# Altium PCB MPU6050.pcbdoc
Units mm, origin at the board's own origin, x right, y up, seen from the top; angles counter-clockwise.
Board outline 22.23 x 31 mm, 2 copper layers (Top Layer, Bottom Layer); 13 components, 155 nets, 57 pads, 16 vias.
Unrouted connection lines stored in the file: 101.
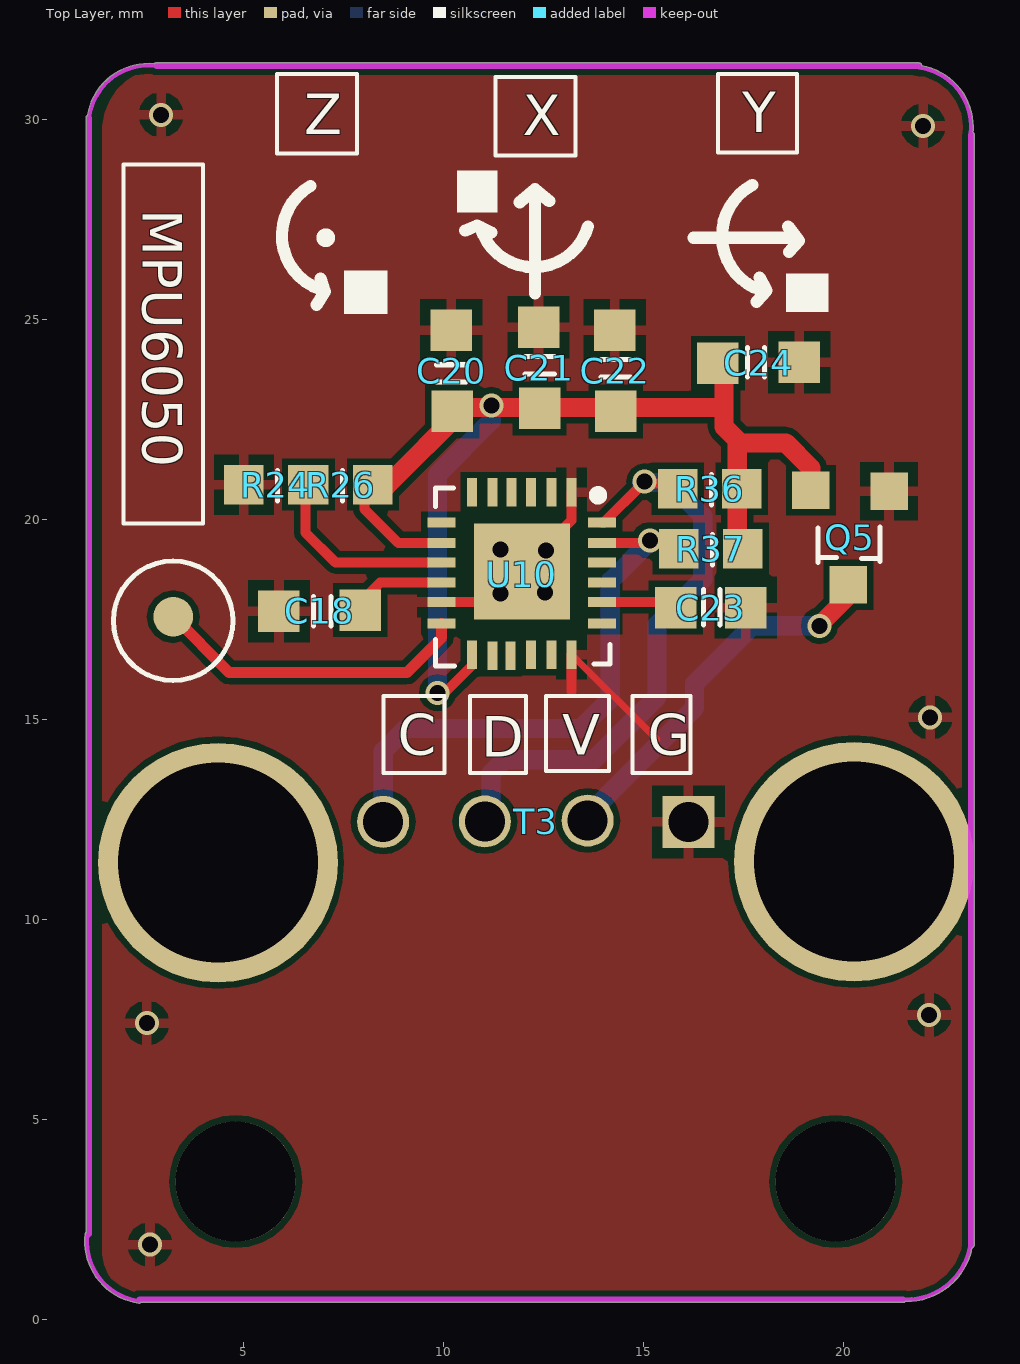
[diagram p0: Top Layer view]
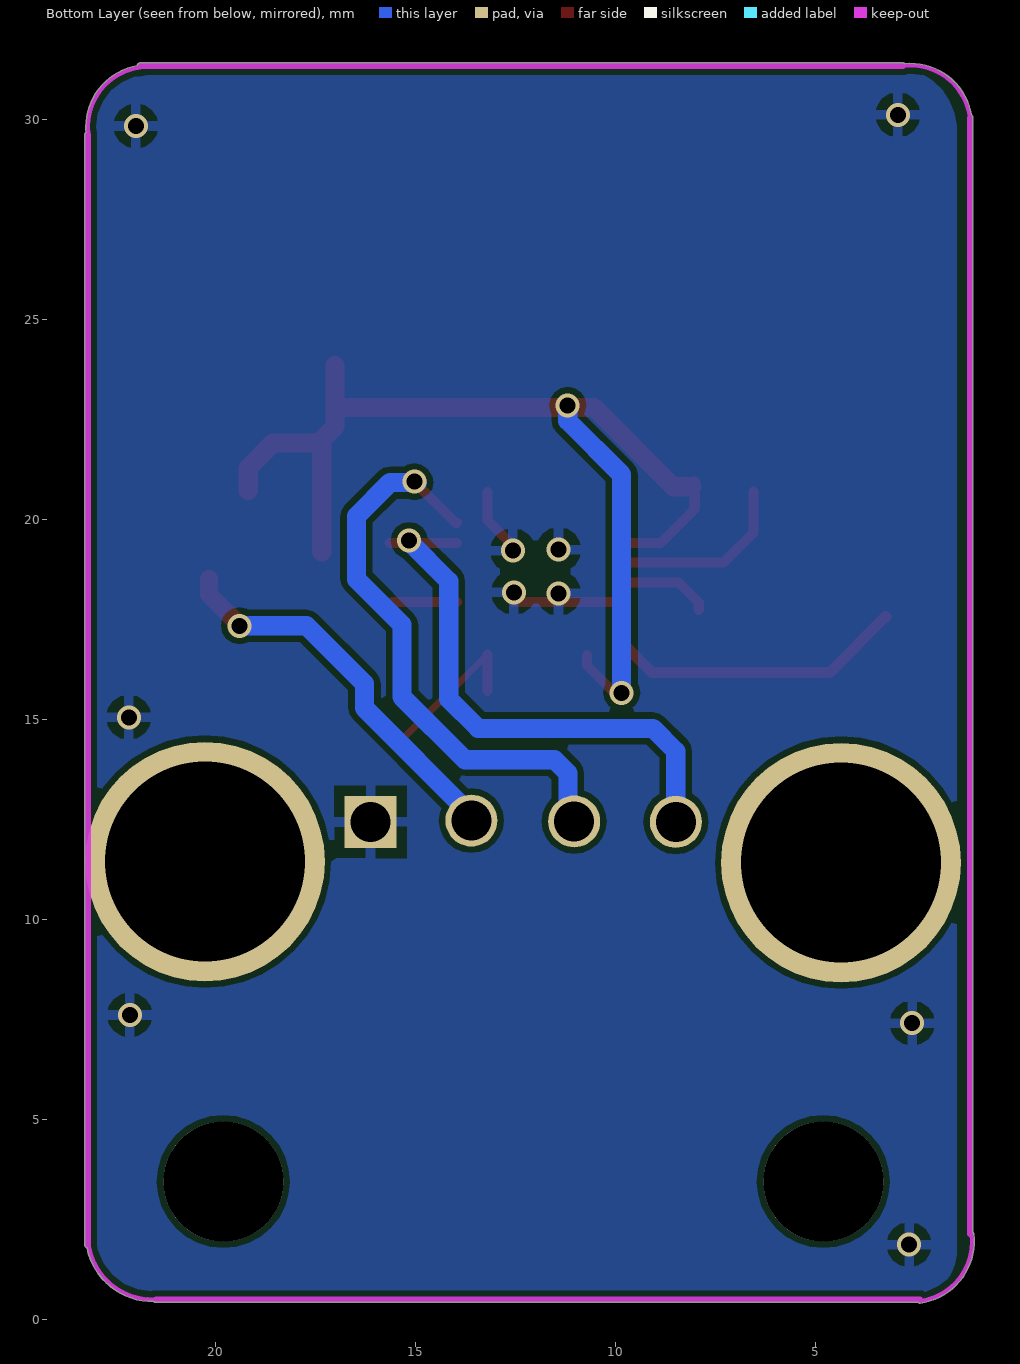
[diagram p1: Bottom Layer view, seen from below]

## Layer stack, top to bottom
Top Solder: solder mask 0.0102, Solder Resist, Dk 3.5
Top Layer: signal copper 0.0356
Dielectric 1: dielectric 0.32, FR-4, Dk 4.8
Bottom Layer: signal copper 0.0356
Bottom Solder: solder mask 0.0102, Solder Resist, Dk 3.5

## Board outline
1.05,2.153 ccw(c2.587,1.956) 2.39,0.419 ccw(c2.397,0.47) 2.434,0.436 21.49,0.436 ccw(c21.49,0.511) 21.543,0.458 ccw(c21.579,2.124) 23.213,1.798 ccw(c23.192,1.87) 23.267,1.87 23.267,29.632 ccw(c23.192,29.632) 23.237,29.692 ccw(c21.693,29.823) 23.243,29.823 ccw(c21.693,29.823) 21.959,31.349 ccw(c21.884,31.347) 21.884,31.422 2.821,31.422 ccw(c2.821,31.347) 2.772,31.403 ccw(c2.631,29.861) 1.102,30.113 ccw(c1.145,30.051) 1.069,30.051 1.069,2.186 ccw(c1.101,2.146)

## Design rules (kind name [scope] priority, off if disabled: settings)
Clearance [All] p1: gap=0.152 ignorepadtopadclearanceinfootprint=FALSE
HoleToHoleClearance [All] p1: gap=0.203 allowstackedmicrovias=TRUE
PolygonConnect [All] p1: connectstyle=Relief reliefconductorwidth=0.254 reliefentries=4 polygonreliefangle="90 Angle" airgapwidth=0.254
RoutingVias [All] p1: holewidth=6 width=8 viastyle="Through Hole" minholewidth=0.3 minwidth=0.6 maxholewidth=0.711 maxwidth=1.27
SilkToSilkClearance [All] p1: silktosilkclearance=0.152
SolderMaskExpansion [All] p1: expansion=0.102
Width [All] p1: maxlimit=5 minlimit=0.203 preferedwidth=0.254
28 further rules are at their usual default settings.

## Components (designator, comment, footprint, x,y, rotation, side; value= is the part's Value field where it differs from the comment)
C18 "104" COMPONENT_5 6.905,17.729 r90 top
C20 "104" COMPONENT_5 10.207,23.724 r0 top
C21 "104" COMPONENT_5 12.391,23.8 r180 top
C22 "103" COMPONENT_5 14.296,23.724 r180 top
C23 "2.2nF" COMPONENT_4 16.684,17.805 r180 top
C24 "105" COMPONENT_5 17.878,23.927 r270 top
Q5 "662K" COMPONENT_3 20.164,19.558 r180 top
R24 "4K7" COMPONENT_6 5.813,20.879 r180 top
R26 "NC" COMPONENT_6 7.438,20.879 r180 top
R36 "4K7" COMPONENT_6 16.659,20.777 r180 top
R37 "4K7" COMPONENT_6 16.684,19.279 r180 top
T3 "弯针连接器KF2510-4P白色" 21 16.125,12.449 r90 top
U10 "MPU-6050" COMPONENT_2 11.96,18.644 r180 top

## Footprints (in the part's own frame and the unit in brackets; to place one, negate y for a bottom-side part, rotate by r counter-clockwise, add the part's x,y. Pads: shape width x height; smd on the part's side, far side on the other; paste and mask are expansions set on the pad)
21 [mm]
  rect 1.3x1.3 hole 1: 1(0,0)
  round 1.3 hole 1: 2(0.031,2.519) 3(0.01,5.09) 4(0,7.63)
COMPONENT_2 [mil]
  rect 9.84x27.84 smd: 1(-49,-80.5) 2(-29,-80.5) 3(-9,-80.5) 4(10,-80.5) 5(29,-80.5) 6(49,-80.5) 13(49,79.5) 14(29,80.5) 15(11,80.5) 16(-9,79.5) 17(-29,79.5) 18(-49,79.5)
  rect 27.84x9.84 smd: 7(79,-50.5) 8(79,-30.5) 9(79,-11.5) 10(79,8.5) 11(79,27.5) 12(79,48.5) 19(-79,48.5) 20(-79,27.5) 21(-79,8.5) 22(-79,-11.5) 23(-79,-30.5) 24(-79,-50.5)
  rect 94.49x94.49 smd: 25(0,-2.5)
  silkscreen extent -87,-84 85,91
COMPONENT_3 [mil]
  rect 36.84x36.84 smd: 1(-38.5,-45.5) 2(38.5,-46.5) 3(1.5,46.5)
  silkscreen extent -30,-11 32,25
COMPONENT_4 [mil]
  rect 40.84x40.84 smd: 4(-34.5,0) 5(34.5,0)
  silkscreen extent -9,-18 7,17
COMPONENT_5 [mil]
  rect 40.84x40.84 smd: 6(-0.5,40) 7(0.5,-40)
  silkscreen extent -15,-11 14,6
COMPONENT_6 [mil]
  rect 38.84x38.84 smd: 8(-31.5,0) 9(31.5,0)
  silkscreen extent -2,-14 -1,16

## Free pads (board coordinates)
  round 0.987 smd: 10(3.247,17.577)
  round 5.99 hole 5.004: 11(20.265,11.455) 12(4.365,11.43)
  round 3 hole 3 mask+0.102: 13(19.807,3.457) 14(4.807,3.457)

## Via types
v1: diameter 0.6, hole 0.4, Top Layer to Bottom Layer, tented both sides, 15 vias
v2: diameter 0.8, hole 0.4, Top Layer to Bottom Layer, 1 vias

## Nets (pads, with @x,y where several pads share a name; then routed paths per layer and width w, separated by ;. In a path a pad name is that pad's centre, name@x,y a point inside that pad or via, vN(x,y) a via of type N, cw(c..) or ccw(c..) an arc to the next point about the centre after c; other vN are vias at no path point)
3.3V: 
+5v: 
AOUT1: 
AOUT2: 
BOUT1: 
BOUT2: 
D+: 
D-: 
DTR: 
GND: 
M11: 
M12: 
M21: 
M22: 
Net: 
NewNet1: 
NewNet2: 
NewNet3: 
NewNet4: 
NewNet15: 
NewNet16: 
NewNet17: 
NewNet18: 
NewNet19: 
NewNet20: 
NewNet21: 
NewNet22: 
NewNet23: 
NewNet24: 
NewNet25: 
NewNet26: 
NewNet27: 
NewNet28: 
NewNet29: 
NewNet30: 
NewNet31: 
NewNet32: 
NewNet33: 
NewNet34: 
NewNet35: 
NewNet36: 
NewNet37: 
NewNet38: 
NewNet39: 
NewNet40: 
NewNet41: 
NewNet42: 
NewNet43: 
NewNet44: 
NewNet45: 
NewNet46: 
NewNet47: 
NewNet48: 
NewNet49: 
NewNet50: 
NewNet51: 
NewNet52: 
NewNet53: 
NewNet54: 
NewNet55: 
NewNet56: 
NewNet57: 
NewNet58: 
NewNet59: Q5.3 T3.2 | length 9.7
  Top Layer w0.456: v1(19.402,17.348) 19.402,17.374 20.164,18.136 Q5.3@20.164,18.517
  Bottom Layer w0.481: T3.2 13.607,12.623 16.278,15.294 16.278,15.9 17.725,17.348 v1(19.402,17.348)
NewNet60: R36.9 T3.3 U10.24 | length 15.2
  Top Layer w0.252: U10.24 14.004,19.926 14.982,20.904 R36.9@15.643,20.904
  Bottom Layer w0.481: T3.3 11.192,12.616 11.192,13.662 11.528,13.998 13.763,13.998 15.338,15.573 15.338,17.374 16.481,18.517 16.481,20.091 15.643,20.93 v1@14.957,20.93
  other v1: 15.033,20.955
NewNet61: R37.9 T3.4 U10.23 | length 14
  Top Layer w0.252: U10.23 R37.9@15.655,19.418
  Bottom Layer w0.481: T3.4 8.495,14.216 9.064,14.786 13.433,14.786 14.169,15.522 14.169,18.466 15.16,19.456 v1(15.16,19.482)
NewNet62: C18.6 C20.6 C21.7 C22.7 C23.4 C24.6 Q5.1 R24.9 T3.1 U10.1 U10.11 U10.18 U10.25 | length 8.2
  Top Layer w0.176: U10.18@13.217,16.624 15.338,14.503
  Top Layer w0.252: U10.11 11.426,17.945 U10.25@12.557,17.945 ; U10.25@12.493,19.279 13.204,19.99 U10.1
  Top Layer w0.254: 13.204,15.725 U10.18
  other v1: 2.663,1.88 2.587,7.417 22.145,7.62 22.17,15.062 11.426,18.161 12.544,18.186 12.569,19.228 11.426,19.253 21.993,29.845 2.943,30.124
NewNet63: 
NewNet64: 
NewNet65: 
NewNet66: 
NewNet67: 
NewNet68: 
NewNet69: 
NewNet70: 
NewNet71: 
NewNet72: 
NewNet73: 
NewNet74: 
NewNet75: 
NewNet76: 
NewNet77: 
NewNet78: 
NewNet79: 
NewNet80: 
NewNet81: 
NewNet82: 
NewNet83: 
NewNet84: 
NewNet85: 
NewNet86: 
NewNet87: 
NewNet88: 
NewNet89: 
NewNet90: 
NewNet91: 
NewNet92: 
NewNet93: 
NewNet94: 
NewNet95: 
NewNet96: 
NewNet97: 
NewNet100: 
NewNet102: 
NewNet104: 
NewNet105: 
NewNet107: 
NewNet112: 
NewNet113: 
NewNet115: 
NewNet116: 
NewNet117: 
NewNet118: 
NewNet119: 
NewNet120: 
NewNet121: 
NewNet122: 
NewNet123: 
NewNet124: 
NewNet125: 
NewNet126: 
NewNet127: 
NewNet128: 
NewNet129: R24.8 R26.9 U10.9 | length 4.7
  Top Layer w0.252: R26.9@6.549,20.701 6.549,19.685 7.299,18.936 U10.9
NewNet130: C20.7 C21.6 C22.6 C24.7 Q5.2 R26.8 R36.8 R37.8 U10.8 U10.13 | length 29.4
  Top Layer w0.252: R26.8@8.023,20.955 8.023,20.269 8.874,19.418 U10.8 ; v1@9.851,15.494 10.715,16.358 U10.13
  Top Layer w0.481: R26.8@8.099,20.828 8.556,20.828 10.537,22.809 17.014,22.809 ; C24.7@17.014,23.851 17.014,22.327 17.421,21.92 18.564,21.92 19.186,21.298 Q5.2 ; R37.8@17.344,19.202 17.344,21.996
  Bottom Layer w0.481: v1(9.851,15.675) 9.851,21.133 11.198,22.479 v1(11.198,22.86)
NewNet131: C23.5 U10.20 | length 1.6
  Top Layer w0.252: U10.20 C23.5@15.579,17.945
NewNet132: C18.7 U10.10 | length 2.4
  Top Layer w0.252: C18.7 7.921,17.932 8.416,18.428 U10.10
NewNet133: pad.10 U10.12 | length 8
  Top Layer w0.278: pad.10 4.644,16.18 9.089,16.18 9.953,17.043 U10.12
NewNet134: 
NewNet135: 
NewNet136: 
NewNet137: 
NewNet138: 
NewNet139: 
NewNet140: 
NewNet141: 
NewNet142: 
NewNet143: 
NewNet144: 
NewNet145: 
NewNet146: 
NewNet147: 
NewNet148: 
NewNet149: 
NewNet150: 
NewNet151: 
R1: 
R2: 
RTS: 
RXD: 
TXD: 
V3: 
VBUS: 
VIN: 
VM: 
pads on no net: U10.2 U10.3 U10.4 U10.5 U10.6 U10.7 U10.14 U10.15 U10.16 U10.17 U10.19 U10.21 U10.22
copper on no net:
  other v2: -69.24,159.106

## Polygon pours and split planes (outlines as drawn)
NewNet62 on Top Layer "GND-No Net" (solid, pour order 6): 21.485,0.457 2.765,0.457 cw(c2.765,1.753) 1.469,1.753 1.469,29.693 cw(c3.12,29.693) 3.12,31.344 21.84,31.344 cw(c21.84,30.048) 23.136,30.048 23.136,2.108 cw(c21.485,2.108)
NewNet62 on Bottom Layer "GND-No Net" (solid, pour order 7): 21.485,0.457 2.765,0.457 cw(c2.765,1.753) 1.469,1.753 1.469,29.693 cw(c3.12,29.693) 3.12,31.344 21.84,31.344 cw(c21.84,30.048) 23.136,30.048 23.136,2.108 cw(c21.485,2.108)

## Keep-outs
Keep-Out Layer:
  lines w0.102: 1.101,2.146 ccw(c2.587,1.956) 2.397,0.47 ; 1.145,30.051 cw(c2.631,29.861) 2.821,31.347 ; 21.49,0.511 ccw(c21.579,2.124) 23.192,2.035 ; 21.884,31.308 cw(c21.693,29.823) 23.179,29.632
  lines w0.15: 1.145,2.146 1.145,30.051 ; 2.397,0.511 21.49,0.511 ; 2.821,31.347 21.884,31.347 ; 23.192,1.87 23.192,29.632

## Silkscreen, mask and mechanical layers (free items; w line width, h text height)
Top Overlay:
  circle w0.303: c7.057,27.051 r0.08
  circle w0.125: c3.243,17.475 r1.494
  region: 8.607,26.238 7.515,26.238 7.515,25.146 8.607,25.146
  region: 11.35,28.727 10.334,28.727 10.334,27.686 11.35,27.686
  region: 19.63,26.162 18.564,26.162 18.564,25.197 19.63,25.197
  lines w0.1: 3.171,19.914 3.984,19.914 3.984,28.88 2.003,28.88 2.003,19.914 3.933,19.914 ; 7.718,29.159 7.845,29.159 ; 13.28,29.108 11.299,29.108 11.299,31.064 13.306,31.064 13.306,29.108 ; 7.845,29.159 7.845,31.14 5.838,31.14 5.838,29.159 7.845,29.159 ; 8.505,13.665 8.505,15.596 10.029,15.596 10.029,13.665 8.505,13.665 ; 10.664,13.665 10.664,15.596 12.061,15.596 12.061,13.665 10.664,13.665 ; 12.569,13.716 12.569,15.596 14.144,15.596 14.144,13.716 12.569,13.716 ; 14.728,13.665 14.728,15.596 16.176,15.596 16.176,13.665 14.728,13.665 ; 16.862,29.185 16.862,31.14 18.843,31.14 18.843,29.185 16.862,29.185
  lines w0.303: 6.676,28.346 ccw(c7.391,27.109) 6.93,25.756 ; 6.829,25.375 7.032,25.705 6.93,26.035 ; 10.537,27.229 10.842,27.356 11.198,27.178 ; 10.923,27.315 ccw(c12.265,27.714) 13.611,27.33 ; 11.909,27.94 12.29,28.27 12.645,27.965 ; 12.29,25.654 12.29,28.092 ; 16.252,27.051 18.804,27.051 ; 17.725,28.372 ccw(c18.404,27.1) 17.954,25.73 ; 17.827,25.451 18.081,25.73 17.903,26.06 ; 18.614,27.33 18.894,26.975 18.64,26.695
  text "Y" at 17.471,29.693 h1.02
  text "Z" at 6.524,29.642 h1.02
  text "X" at 11.985,29.616 h1.02
  text "MPU6050" at 2.485,27.762 h0.99 r270
  text "C" at 8.861,14.122 h1.02
  text "V" at 12.976,14.122 h1.02
  text "G" at 15.109,14.122 h1.02
  text "D" at 10.944,14.072 h1.02